# Altium PCB ADC_Mod_1.PcbDoc
Units mil, origin at the board's own origin, x right, y up, seen from the top; angles counter-clockwise.
Board outline 625.03 x 895.03 mil, 4 copper layers (Top Layer, Signal Layer 1, Signal Layer 2, Bottom Layer), stack 62.2 mil thick; 50 components, 47 nets, 208 pads, 31 vias.
Unrouted connection lines stored in the file: 3.
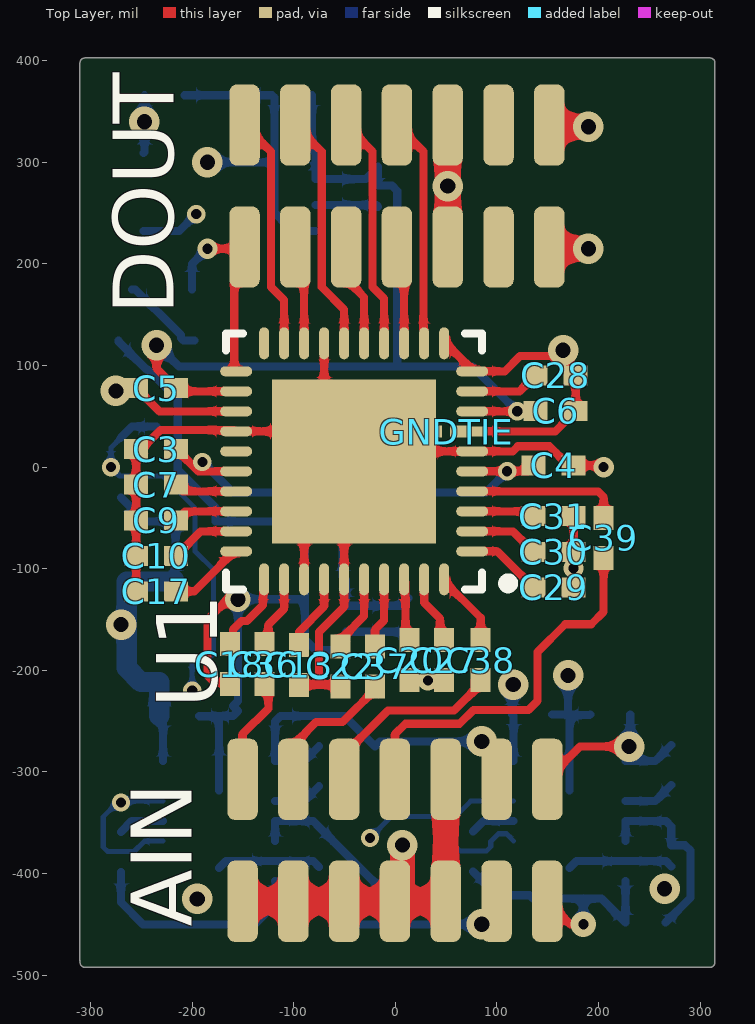
[diagram p0: Top Layer view]
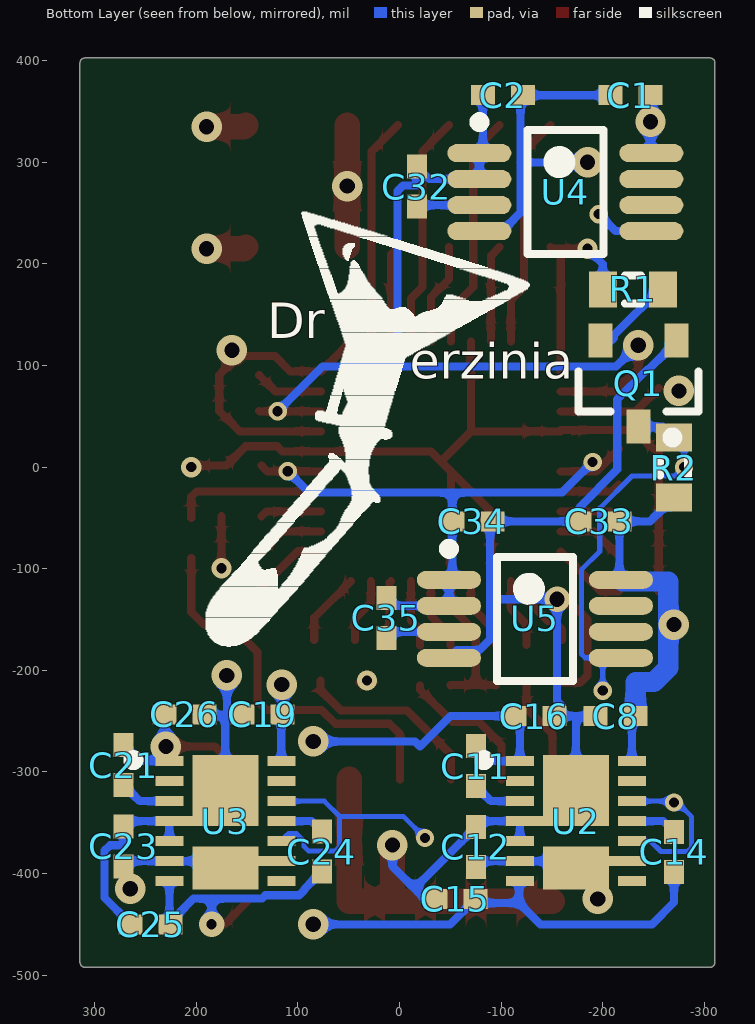
[diagram p1: Bottom Layer view, seen from below]
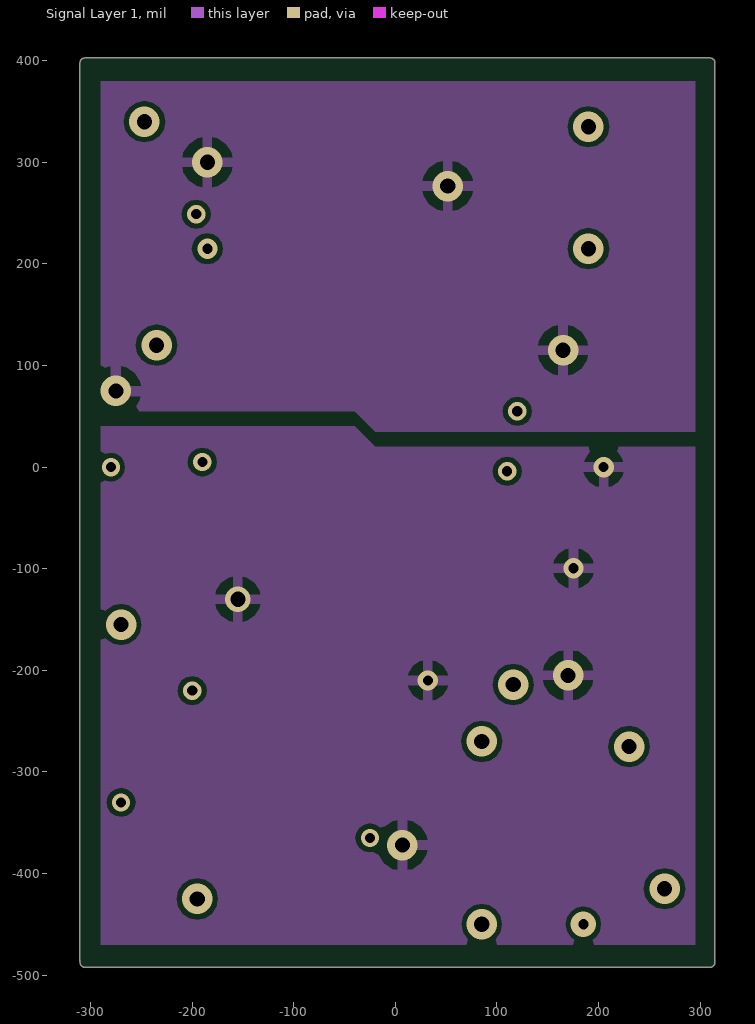
[diagram p2: Signal Layer 1]
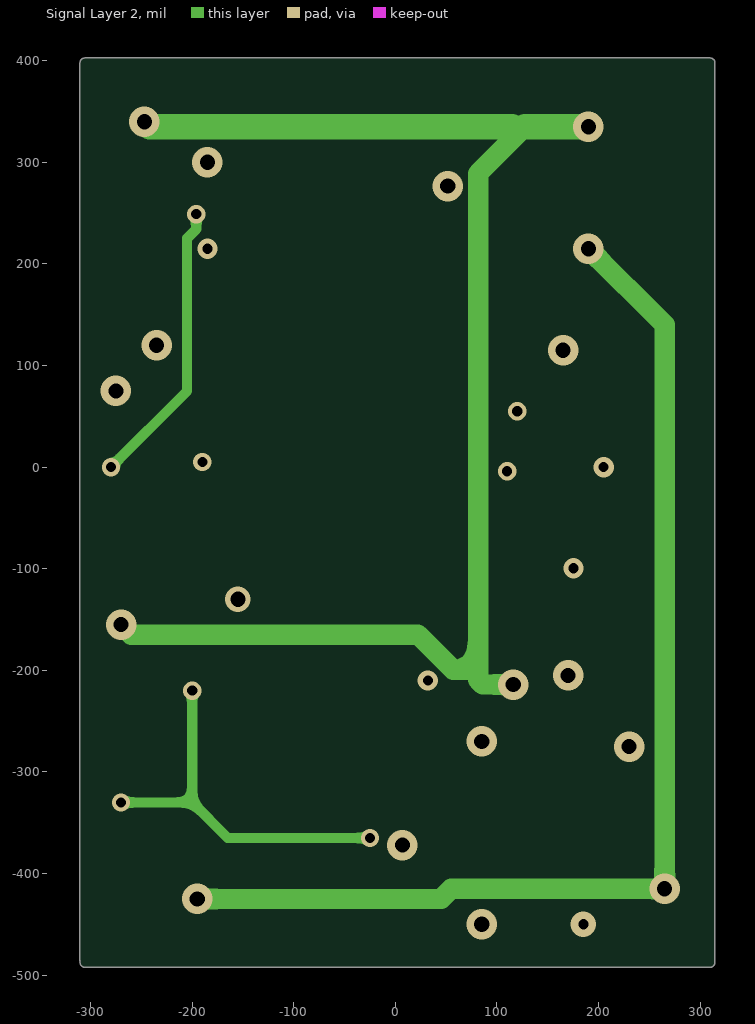
[diagram p3: Signal Layer 2]

## Layer stack, top to bottom
Top Solder: solder mask 0.4, Solder Resist, Dk 3.5
Top Layer: signal copper 1.4
Dielectric 1: core 7, FR-4, Dk 4.2
Signal Layer 1: signal copper 0.7
Dielectric 3: prepreg 44, Dk 4.2
Signal Layer 2: signal copper 0.7
Dielectric 2: core 7, Dk 4.2
Bottom Layer: signal copper 1.4
Bottom Solder: solder mask 0.4, Solder Resist, Dk 3.5

## Board outline
-310.34,-486.25 cw(c-305.43,-485.2) -310.45,-485.2 -310.45,397.71 cw(c-305.43,397.71) -305.43,402.72 309.57,402.72 cw(c309.57,397.71) 314.58,397.71 314.58,-487.29 cw(c309.57,-487.29) 309.57,-492.31 -305.43,-492.31 cw(c-305.43,-487.29)

## Design rules (kind name [scope] priority, off if disabled: settings)
Clearance [All] p1: gap=5 ignorepadtopadclearanceinfootprint=FALSE except(0: Arc-Hole Track-Hole SMDPad-Hole THPad-Hole Via-Hole Fill-Hole Poly-Hole Region-Hole Text-Hole)
HoleSize [All] p1: absolutevalues=TRUE maxlimit=100 minlimit=10 maxpercent=80.000 minpercent=20.000
PolygonConnect [All] p1: connectstyle=Relief reliefconductorwidth=10 reliefentries=4 polygonreliefangle="90 Angle" airgapwidth=10
RoutingVias [All] p1: holewidth=10 width=20 viastyle="Through Hole" minholewidth=10 minwidth=18 maxholewidth=28 maxwidth=50
SolderMaskExpansion [All] p1: expansion=4
Width [All] p1: maxlimit=25 minlimit=5 preferedwidth=10 toplayer_prefwidth=8 midlayer1_minwidth=10 midlayer2_minwidth=10 bottomlayer_prefwidth=8 minimp=50.000000 maximp=50.000000 favimp=50.000000
29 further rules are at their usual default settings.

## Components (designator, comment, footprint, x,y, rotation, side; value= is the part's Value field where it differs from the comment)
AIN "Header 7X2" CLP-107-02-L-DH-TR -0.43,-367.29 r180 top
C1 "Cap" 0402 -227.28,366.02 r180 bottom value=1uF
C2 "Cap" 0402 -101.65,366.02 r0 bottom value=10uF
C3 "Cap" 0402 -235.43,17.71 r0 top value=1uF
C4 "Cap" 0402 155.67,1.65 r180 top value=1uF
C5 "Cap" 0402 -235.43,77.71 r180 top value=1uF
C6 "Cap" 0402 157.8,55.39 r0 top value=1uF
C7 "Cap" 0402 -235.43,-17.29 r0 top value=1uF
C8 "Cap" 0402 -212.72,-245.04 r0 bottom value=10uF
C9 "Cap" 0402 -235.43,-52.29 r0 top value=1uF
C10 "Cap" 0402 -235.43,-87.29 r0 top value=1uF
C11 "Cap" 0402 -75.16,-294.41 r90 bottom value=0.01uF
C12 "Cap" 0402 -75.16,-373.78 r90 bottom value=10uF
C13 "Cap" 0402 -95,-194.69 r90 top value=1uF
C14 "Cap" 0402 -270.16,-378.78 r270 bottom value=0.01uF
C15 "Cap" 0402 -55,-425 r180 bottom value=10uF
C16 "Cap" 0402 -132.72,-245.04 r0 bottom value=10uF
C17 "Cap" 0402 -235.43,-122.29 r0 top value=1uF
C18 "Cap" 0402 -163,-194 r90 top value=10uF
C19 "Cap" 0402 134.72,-243.46 r0 bottom value=10uF
C20 "Cap" 0402 14,-190 r90 top value=1uF
C21 "Cap" 0402 271.54,-293.35 r90 bottom value=0.01uF
C22 "Cap" 0402 -54,-196 r90 top value=10uF
C23 "Cap" 0402 271.54,-373.35 r90 bottom value=10uF
C24 "Cap" 0402 76.54,-378.35 r270 bottom value=0.01uF
C25 "Cap" 0402 245,-450 r180 bottom value=10uF
C26 "Cap" 0402 211.54,-243.35 r0 bottom value=10uF
C27 "Cap" 0402 48,-190 r90 top value=1uF
C28 "Cap" 0402 157.8,90.39 r0 top value=10uF
C29 "Cap" 0402 155.67,-118.35 r180 top value=10uF
C30 "Cap" 0402 155.67,-83.35 r180 top value=1uF
C31 "Cap" 0402 155.67,-48.35 r180 top value=10uF
C32 "Cap" 0402 -16.97,276.02 r270 bottom value=10uF
C33 "Cap" 0402 -196.65,-53.35 r180 bottom value=1uF
C34 "Cap" 0402 -71.65,-53.35 r0 bottom value=10uF
C35 "Cap" 0402 13.03,-148.35 r270 bottom value=10uF
C36 "Cap" 0402 -129,-194 r90 top value=10uF
C37 "Cap" 0402 -20,-196 r90 top value=10uF
C38 "Cap" 0402 84,-190 r90 top value=10uF
C39 "Cap" 0402 205,-69.69 r90 top value=10uF
DOUT "Header 7X2" FTSH-107-01-L-DH 1.54,276.65 r180 top
GNDTIE "2 way net tie junction" 2way_LP 50,35 r180 top net-tie
Q1 "NPN" SOT23_L -235,82.32 r270 bottom
R1 "Res3" J1-0603 -229.53,175 r180 bottom value=1K
R2 "Res3" J1-0603 -270,-0.47 r270 bottom value=10K
U1 "MAXIM11043" QFN50P600X600X80_HS-41N -40.59,5.71 r180 top
U2 "LT3032EDE#PBF" LT-DE14MA-14_V -173.46,-348.46 r180 bottom
U3 "LT3032EDE#PBF" LT-DE14MA-14_V 171.54,-348.46 r180 bottom
U4 "LT1762EMS8-3.3#PBF" LT-MS8_N -163.23,270.71 r180 bottom
U5 "LT1762EMS8-3.3#PBF" LT-MS8_N -133.23,-149.29 r180 bottom

## Footprints (in the part's own frame and the unit in brackets; to place one, negate y for a bottom-side part, rotate by r counter-clockwise, add the part's x,y. Pads: shape width x height; smd on the part's side, far side on the other; paste and mask are expansions set on the pad)
2way_LP [mil] "2 way low power net tie junction"
  rrect5% 20x12 smd paste-100: 1(-14,0) 2(14,0)
0402 [mm] "Chip Capacitor, Body 1.0x0.5mm, IPC High Density"
  rect 0.6x0.5 smd: 1(-0.5,0) 2(0.5,0)
  body extent -0.55,-0.3 0.55,0.3, height 1.3
CLP-107-02-L-DH-TR [mil]
  rrect50% 30x80 smd: 1(150,60) 2(150,-60) 3(100,60) 4(100,-60) 5(50,60) 6(50,-60) 7(0,60) 8(0,-60) 9(-50,60) 10(-50,-60) 11(-100,60) 12(-100,-60) 13(-150,60) 14(-150,-60)
  body extent -184,-90 184,90, height 136
FTSH-107-01-L-DH [mil]
  rrect50% 30x80 smd: 1(150,60) 2(150,-60) 3(100,60) 4(100,-60) 5(50,60) 6(50,-60) 7(0,60) 8(0,-60) 9(-50,60) 10(-50,-60) 11(-100,60) 12(-100,-60) 13(-150,60) 14(-150,-60)
  body extent -175,-344 175,85, height 132
J1-0603 [mm] "Chip Resistor, Body 1.6x0.8mm, IPC High Density"
  rect 0.7x0.9 smd: 1(-0.75,0) 2(0.75,0)
  silkscreen extent -0.2,-0.35 0.2,0.35, body extent -0.85,-0.48 0.85,0.48, height 0.9
LT-DE14MA-14_V [mm] "DE14MA, 14-Leads, Body 4x3mm, Pitch 0.5mm"
  rect 0.7x0.25 smd: 1(-1.4,1.5) 2(-1.4,1) 3(-1.4,0.5) 4(-1.4,0) 5(-1.4,-0.5) 6(-1.4,-1) 7(-1.4,-1.5) 8(1.4,-1.5) 9(1.4,-1) 10(1.4,-0.5) 11(1.4,0) 12(1.4,0.5) 13(1.4,1) 14(1.4,1.5)
  rect 1.65x1.78 smd: 15(0,0.765)
  rect 1.65x1.07 smd: 16(0,-1.17)
  rect 0.3x0.25 smd: ""(-0.97,0)
  rect 0.5x0.25 smd: ""(0.9,-1)
  silkscreen extent -2.43,1.4 -2.18,1.65, body extent -1.5,-2 1.5,2, height 0.75
LT-MS8_N [mm] "SOP, 8-Leads, Body 3x3mm, Pitch 0.65mm, IPC Medium Density"
  oval 1.6x0.45 smd: 1(-2.15,0.975) 2(-2.15,0.325) 3(-2.15,-0.325) 4(-2.15,-0.975) 5(2.15,-0.975) 6(2.15,-0.325) 7(2.15,0.325) 8(2.15,0.975)
  silkscreen extent -2.28,-1.55 0.95,1.87, body extent -1.55,-1.55 1.55,1.55, height 1.1
QFN50P600X600X80_HS-41N [mm] "QFN, 40-Leads, Body 6.00x6.00mm, Pitch 0.50mm, Thermal Pad 4.10x4.10mm, IPC Medium Density"
  oval 0.8x0.25 smd: 1(-2.95,2.25) 2(-2.95,1.75) 3(-2.95,1.25) 4(-2.95,0.75) 5(-2.95,0.25) 6(-2.95,-0.25) 7(-2.95,-0.75) 8(-2.95,-1.25) 9(-2.95,-1.75) 10(-2.95,-2.25) 21(2.95,-2.25) 22(2.95,-1.75) 23(2.95,-1.25) 24(2.95,-0.75) 25(2.95,-0.25) 26(2.95,0.25) 27(2.95,0.75) 28(2.95,1.25) 29(2.95,1.75) 30(2.95,2.25)
  oval 0.25x0.8 smd: 11(-2.25,-2.95) 12(-1.75,-2.95) 13(-1.25,-2.95) 14(-0.75,-2.95) 15(-0.25,-2.95) 16(0.25,-2.95) 17(0.75,-2.95) 18(1.25,-2.95) 19(1.75,-2.95) 20(2.25,-2.95) 31(2.25,2.95) 32(1.75,2.95) 33(1.25,2.95) 34(0.75,2.95) 35(0.25,2.95) 36(-0.25,2.95) 37(-0.75,2.95) 38(-1.25,2.95) 39(-1.75,2.95) 40(-2.25,2.95)
  rect 4.1x4.1 smd: 41(0,0)
  silkscreen extent -3.98,-3.2 3.2,3.2, body extent -3.05,-3.05 3.05,3.05, height 0.8
SOT23_L [mm] "SOT23, 3-Leads, Body 2.9x1.3mm, Pitch 0.95mm, Lead Span 2.3mm - Reverse Pinning, IPC High Density"
  rect 0.85x0.6 smd: 1(1.075,0) 2(-1.075,-0.95) 3(-1.075,0.95)
  silkscreen extent -0.3,-1.5 1.47,1.5, body extent -0.7,-1.5 0.7,1.5, height 1.1

## Part data
AIN DOUT: "Header, 7-Pin, Dual row", LatestRevisionDate=17-Jul-2002, LatestRevisionNote="Re-released for DXP Platform.", Publisher="Altium Limited", System=Connector
C1 C2 C3 C4 C5 C6 C7 C8 C9 C10 C11 C12 C13 C14 C15 C16 C17 C18 C19 C20 C21 C22 C23 C24 C25 C26 C27 C28 C29 C30 C31 C32 C33 C34 C35 C36 C37 C38 C39: "Capacitor", LatestRevisionDate=17-Jul-2002, LatestRevisionNote="Re-released for DXP Platform.", PackageDescription="Radial Cap, Thru-Hole; 2 Leads; 0.3 in Pin Spacing", PackageReference=RAD-0.3, Published=8-Jun-2000, Publisher="Altium Limited"
GNDTIE: library part 2way, ComponentLink1Description=Source, ComponentLink1URL=http://www.edatools.cz/addons, FootprintNote="LP=12mil, MP=40mil, HP=120mil"
Q1: "NPN Bipolar Transistor", Code_JEDEC=TO-226-AA, LatestRevisionDate=17-Jul-2002, LatestRevisionNote="Re-released for DXP Platform.", PackageDescription="TO, Flat Index; 3 In-Line, Axial Leads; Body Dia. 4.8mm; Leads 0.55 x 0.51 mm (max)", PackageReference=TO-226-AA, Published=8-Jun-2000, Publisher="Altium Limited"
R1 R2: "Resistor", LatestRevisionDate=29-May-2009, LatestRevisionNote="IPC-7351 Footprint Added.", PackageDescription="Chip Resistor", PackageReference=J1-0603, Published=8-Jun-2000, Publisher="Altium Limited"
U2 U3: "Dual 150 mA Positive / Negative Low Noise Low Dropout Linear Regulator, +/-2.3 to +/-20 V Vin, Adjustable Vout, 14-pin SON (DE14MA-14), -40 to 125 degC, Pb-Free", Dropout Voltage(V)=0.3, Manufacturer="Linear Technology", Output Voltage=Adj,-Adj, Shutdown Current(uA)=0.1, Supplier Part Number 1=LT3032EDE#PBF-ND, ComponentLink1Description="Manufacturer URL", ComponentLink1URL=http://www.linear.com/, ComponentLink2Description=Datasheet, ComponentLink2URL=http://cds.linear.com/docs/en/datasheet/3032fd.pdf, ComponentLink3Description="Package Specification", ComponentLink3URL=http://cds.linear.com/docs/en/packaging/DFN_14_05-08-1731.pdf, DatasheetVersion="Rev. D", Discrete Pass Element=no, Iout(mA)=150, Isupply(mA)=0.025, Mounting Technology="Surface Mount", Noise(uV)=30, Number of Outputs=2, PackageDescription="14-Pin Plastic DFN, Body 4 x 3 mm, Pitch 0.5 mm", PackageReference=DE14MA-14, PackageVersion="Rev. A, 06/2010", PartNumber=LT3032EDE#PBF, PSRR(dB)=68, RoHS=TRUE, Supplier 1=Digi-Key, Supplier 2=Farnell, Supplier 3=Newark, Supplier Part Number 2=2289423, Supplier Part Number 3=52R9875, Vin Max(V)=+/-20, Vin Min(V)=+/-2.3, Vout Max(V)=+/-20, Vout Min(V)=+/-1.22
U4 U5: "150 mA, Low Noise, LDO Micropower Regulator, 1.8 to 20 V Vin, 3.3 V Vout, 8-pin SOP (MS8-8), -40 to 125 degC, Pb-Free", Dropout Voltage(V)=0.27, Manufacturer="Linear Technology", Output Voltage="3.3 V", Shutdown Current(uA)=1, Supplier Part Number 1=LT1762EMS8-3.3#PBF-ND, ComponentLink1Description="Manufacturer URL", ComponentLink1URL=http://www.linear.com/, ComponentLink2Description=Datasheet, ComponentLink2URL=http://cds.linear.com/docs/en/datasheet/1762fa.pdf, ComponentLink3Description="Package Specification", ComponentLink3URL=http://cds.linear.com/docs/en/packaging/05081660_G_MS8.pdf, DatasheetVersion="Rev. A", Discrete Pass Element=no, Iout(mA)=150, Isupply(mA)=0.025, Mounting Technology="Surface Mount", Noise(uV)=20, Number of Outputs=1, PackageDescription="8-Pin Plastic MSOP, Body 3 x 3 mm, Pitch 0.65 mm", PackageReference=MS8, PackageVersion="Rev. G, 05/2013", PartNumber=LT1762EMS8-3.3#PBF, PSRR(dB)=65, RoHS=TRUE, Supplier 1=Digi-Key, Supplier 2=Farnell, Supplier 3=Newark, Supplier Part Number 2=1273611, Supplier Part Number 3=57M6001, Vin Max(V)=20, Vin Min(V)=1.8

## Via types
v1: diameter 30, hole 15, Top Layer to Bottom Layer, 17 vias
v2: diameter 18, hole 10, Top Layer to Bottom Layer, 8 vias
v3: diameter 20, hole 10, Top Layer to Bottom Layer, 4 vias
v4: diameter 25, hole 15, Top Layer to Bottom Layer, 1 vias
v5: diameter 25, hole 10, Top Layer to Bottom Layer, 1 vias

## Nets (pads, with @x,y where several pads share a name; then routed paths per layer and width w, separated by ;. In a path a pad name is that pad's centre, name@x,y a point inside that pad or via, vN(x,y) a via of type N, cw(c..) or ccw(c..) an arc to the next point about the centre after c; other vN are vias at no path point)
3.3VA: AIN.12 C11.2 C16.2 U2.1 | length 308.4
  Bottom Layer w8: C11.2 -89.84,-289.41 U2.1 -118.35,-250.35 C16.2 -49.96,-245.04 -20,-275 -15,-270 v1(85,-270)
3.3VA2: C3.2 C4.2 C34.2 C35.1 U1.5 U1.26 U5.1 U5.2 | length 626
  Top Layer w8: C3.2 -193.91,-4.13 U1.26@-158.59,-4.13 ; U1.5@77.41,-4.13 v2(110,-4.13) 130.2,-4.13 C4.2
  Bottom Layer w8: v2(-190,5) -160,-25 -51.97,-25 ; C35.1 5.2,-136.5 U5.2 U5.1 -51.97,-107.52 C34.2 -51.97,-25 ; v2(110,-4.13) 89.13,-25 -51.97,-25
3.3VD: C2.2 C5.1 C6.1 C32.1 U1.8 U1.22 U4.1 U4.2 | length 916
  Top Layer w8: v1(-235,120) -235,96.96 C5.1 -212.65,74.61 U1.22@-158.59,74.61 ; U1.8@77.41,54.92 v2(120,54.92) 137.64,54.92 C6.1
  Bottom Layer w8: v1(-235,120) -234.22,120 -213.14,98.91 5,98.91 ; C2.2 -81.97,312.48 U4.1 U4.2 -29.17,283.5 C32.1 -16.97,277.15 -3.4,277.15 1.87,271.88 1.87,102.04 5,98.91 ; v2(120,54.92) 76.01,98.91 5,98.91
5VA: AIN.14 C21.2 C26.2 U3.1 | length 193.2
  Top Layer w8: AIN.14 181.86,-275 v1(230,-275)
  Bottom Layer w8: C26.2 231.22,-284.84 U3.1 255.79,-289.41 C21.2
-3.3VA: AIN.11 C14.2 C15.2 U2.7 | length 436.5
  Bottom Layer w8: C14.2 -270.16,-428.23 -248.35,-450.04 -138.66,-450.04 -117.72,-429.09 ; U2.7 -117.72,-408.15 -117.72,-429.09 ; v1(85,-450) -49.68,-450 C15.2 -78.78,-429.09 -117.72,-429.09
-5VA: AIN.13 C24.2 C25.2 U3.7 | length 282.6
  Top Layer w8: AIN.13 172.28,-450 v5(185,-450)
  Bottom Layer w8: C24.2 93.64,-415.13 93.64,-416.17 98.91,-421.44 132.18,-421.44 135.33,-424.59 185,-424.59 ; v5(185,-450) 185,-424.59 ; U3.7 226.54,-407.64 226.54,-448.35 202.78,-424.59 185,-424.59
-V: C12.1 C23.1 DOUT.13 U2.6 U2.9 U2.16 U3.6 U3.9 U3.16 | length 1372.7
  Top Layer w25: DOUT.13 153.19,215 v1(190,215)
  Signal Layer 2 w20: v1(-195,-425) 45,-425 55,-415 v1(265,-415) 265,140 v1(190,215)
  Bottom Layer w8: U2.16 -166.77,-387.83 U2.6 -80.79,-387.83 C12.1 ; U3.16 178.23,-387.83 U3.6 266.34,-387.83 C23.1
AGND: AIN.1 AIN.3 AIN.5 AIN.7 AIN.9 AIN.10 C3.1 C4.1 C7.1 C8.2 C9.1 C10.1 C12.2 C13.1 C15.1 C16.1 C17.1 C18.1 C19.2 C20.1 C22.1 C23.2 C25.1 C26.1 C27.1 C29.1 C30.1 C31.1 C33.1 C34.1 GNDTIE.2 Q1.3 U1.6 U1.17 U1.24 U1.33 U1.35 U1.41 U2.4 U2.5 U2.15 U3.4 U3.5 U3.15 U5.4 | length 3031.7
  Top Layer w8: C17.1 C10.1 C9.1 C7.1 C3.1 -250.13,17.71 -231.29,36.55 -158.59,36.55 -158.59,35.24 U1.41@-70.12,35.24 ; C18.1@-160,-211.98 -178.02,-211.98 -185,-205 -185,-150 -165,-130 v4(-155,-130) ; C13.1@-94.69,-214.68 C13.1 -75,-214.37 ; U1.33@-89.8,-112.29 -89.8,-43.5 U1.41@-50.43,-4.13 ; U1.17@-70.12,123.71 U1.41@-70.12,35.24 ; C22.1@-50,-214.68 -50.32,-214.37 -75,-214.37 ; v3(32,-210) 27.45,-210 25.47,-211.98 C27.1@39.57,-211.98 ; v3(175.35,-99.61) C30.1 C31.1 ; v3(205,0) 203.35,1.65 C4.1 170.37,1.65 151.52,20.5 120.45,20.5 115.5,15.55 77.41,15.55 -30.75,15.55 U1.41 ; -75,-214.37 -75,-162.4 -50.43,-137.83 -50.43,-112.29 U1.41@-50.43,-4.13 ; U1.41@-70.12,35.24 U1.41 ; U1.41@-50.43,-4.13 U1.41
  Top Layer w25: AIN.1 AIN.3 AIN.5 AIN.7 ; v1(7,-372) 7,-419.86 AIN.7 ; AIN.10 AIN.9 AIN.7
  Bottom Layer w8: Q1.3 -272.4,123.46 -244.94,96 -243.76,96 -214.19,66.43 -214.19,-2.4 -176.97,-39.62 C33.1 C34.1 -89.08,-55.61 -89.08,-135 ; C8.2 -192.91,-245.16 -173.46,-245.16 ; U2.15 -173.46,-245.16 ; U2.5 U2.4 -80.79,-348.46 C12.2 -14.63,-414.63 ; U5.4 -56.32,-179.94 -78.62,-179.94 -89.08,-169.48 -89.08,-135 ; C15.1 -25,-425 -14.63,-414.63 ; v1(7,-372) 7,-393 -14.63,-414.63 ; C19.2 171.02,-243.46 ; v1(170,-205) 170,-242.44 171.02,-243.46 ; U3.15 171.54,-243.98 ; C26.1 191.22,-243.98 171.54,-243.98 ; U3.5 U3.4 266.34,-348.46 C23.2 271.54,-372.22 285.11,-372.22 290.38,-377.49 290.38,-423.87 C25.1@265.91,-448.35 ; -173.46,-245.16 -173.35,-245.04 -160,-245.04 -155,-240.04 -160,-235.04 -155,-230.04 v4(-155,-130) -94.08,-130 -89.08,-135 ; 171.02,-243.46 171.54,-243.98
DGND: C1.1 C2.1 C5.2 C6.2 C28.2 DOUT.9 DOUT.10 GNDTIE.1 U1.7 U1.10 U1.11 U1.23 U4.4 | length 841.7
  Top Layer w8: C5.2 -232.33,54.92 U1.23@-158.59,54.92 ; U1.11@47.99,123.71 77.41,94.29 107.63,94.29 122.57,109.24 153.65,109.24 158.92,103.96 163.91,103.96 C28.2 C6.2 157.32,35.24 U1.7@77.41,35.24
  Top Layer w25: DOUT.9 v1(51.54,276.65) DOUT.10
  Bottom Layer w8: C1.1 C2.1 -119.08,363.76 -119.08,300 ; v1(-185,300) -119.08,300 ; U4.4 -100.89,232.32 -119.08,250.52 -119.08,300
  other v1: -275,75 165,115
NetAIN_2: AIN.2 C36.1 | length 103.5
  Top Layer w8: AIN.2 -150.43,-262.83 -125,-237.4 C36.1@-125,-214.37
NetAIN_4: AIN.4 C37.1 | length 140.9
  Top Layer w8: AIN.4 -100.43,-273.43 -78,-251 -51.93,-251 -20,-219.07 C37.1@-20,-215
NetAIN_6: AIN.6 C38.1 | length 188.6
  Top Layer w8: AIN.6 -50.43,-282.83 -7.2,-239.61 57.8,-239.61 78,-219.4 C38.1@78,-210
NetAIN_8: AIN.8 C39.1 | length 381
  Top Layer w8: AIN.8 -0.43,-262.83 9.8,-252.61 63.18,-252.61 76.79,-239 131,-239 140,-230 140,-181.81 167.2,-154.61 192.8,-154.61 205,-142.4 C39.1
NetC7_2: C7.2 U1.27 | length 59.9
  Top Layer w8: C7.2 -209.22,-23.82 U1.27@-158.59,-23.82
NetC9_2: C9.2 U1.28 | length 60.8
  Top Layer w8: C9.2 -206.96,-43.5 U1.28@-158.59,-43.5
NetC10_2: C10.2 U1.29 | length 67.1
  Top Layer w8: C10.2 -191.65,-63.19 U1.29@-158.59,-63.19
NetC11_1: C11.1 U2.3 | length 49.3
  Bottom Layer w8: U2.3 -89.84,-328.78 C11.1
NetC13_2: C13.2 U1.34 | length 73
  Top Layer w8: C13.2 -95,-162.13 -70.12,-137.24 U1.34@-70.12,-112.29
NetC14_1: C14.1 U2.11 | length 46
  Bottom Layer w8: C14.1 -259.53,-348.46 U2.11
NetC17_2: C17.2 U1.30 | length 73.5
  Top Layer w8: C17.2 -198.01,-122.29 U1.30@-158.59,-82.87
NetC18_2: C18.2 U1.31 | length 74
  Top Layer w8: C18.2@-160,-170.31 -160,-160 -151.5,-151.5 -146.09,-151.5 -130.43,-135.84 -130.43,-113.55 U1.31@-129.17,-112.29
NetC20_2: C20.2 U1.38 | length 58.6
  Top Layer w8: U1.38@8.62,-112.29 10,-113.67 C20.2@10,-170.31
NetC21_1: C21.1 U3.3 | length 51.4
  Bottom Layer w8: U3.3 255.79,-328.78 C21.1
NetC22_2: C22.2 U1.36 | length 71
  Top Layer w8: C22.2@-50,-175.31 -50,-165.93 -30.75,-146.68 U1.36@-30.75,-112.29
NetC24_1: C24.1 U3.11 | length 44.1
  Bottom Layer w8: C24.1 86.73,-348.46 U3.11
NetC27_2: C27.2 U1.39 | length 64.5
  Top Layer w8: U1.39@28.31,-112.29 28.31,-133.31 44,-149 C27.2@44,-170.31
NetC28_1: C28.1 U1.9 | length 67.2
  Top Layer w8: U1.9@77.41,74.61 122.32,74.61 C28.1
NetC29_2: C29.2 U1.1 | length 73.3
  Top Layer w8: U1.1@77.41,-82.87 100.51,-82.87 C29.2
NetC30_2: C30.2 U1.2 | length 66.9
  Top Layer w8: U1.2@77.41,-63.19 115.83,-63.19 C30.2
NetC31_2: C31.2 U1.3 | length 60.6
  Top Layer w8: U1.3@77.41,-43.5 131.14,-43.5 C31.2
NetC32_2: C32.2 U4.3 | length 62.3
  Bottom Layer w8: U4.3 -18.54,257.91 C32.2
NetC35_2: C35.2 U5.3 | length 64.1
  Bottom Layer w8: U5.3 7.09,-162.09 C35.2
NetC36_2: C36.2 U1.32 | length 69.1
  Top Layer w8: C36.2@-125,-175 -125,-155 -109.49,-139.49 U1.32@-109.49,-112.29
NetC37_2: C37.2 U1.37 | length 67
  Top Layer w8: C37.2@-20,-175.63 -20,-160 -11.06,-151.06 U1.37@-11.06,-112.29
NetC38_2: C38.2 U1.40 | length 72.9
  Top Layer w8: U1.40@47.99,-112.29 84,-148.3 C38.2
NetC39_2: C39.2 U1.4 | length 150.6
  Top Layer w8: U1.4@77.41,-23.82 199.63,-23.82 205,-29.19 C39.2
NetDOUT_1: DOUT.1 R1.1 U1.21 | length 207.7
  Top Layer w8: v3(-185,215) DOUT.1@-150.12,215 ; U1.21@-158.59,94.29 -158.59,206.53 DOUT.1@-150.12,215 ; DOUT.1 DOUT.1@-150.12,215
  Bottom Layer w8: R1.1 -200,200 v3(-185,215)
NetDOUT_2: DOUT.2 U1.19 | length 229.1
  Top Layer w8: DOUT.2 -122.46,310.65 -122.46,177.32 -109.49,164.34 U1.19@-109.49,123.71
NetDOUT_3: DOUT.3 U1.18 | length 96.5
  Top Layer w8: DOUT.3 -89.8,207.99 U1.18@-89.8,123.71
NetDOUT_4: DOUT.4 U1.16 | length 232.8
  Top Layer w8: DOUT.4 -72.46,310.65 -72.46,177.32 -50.43,155.29 U1.16@-50.43,123.71
NetDOUT_5: DOUT.5 U1.15 | length 100.3
  Top Layer w8: DOUT.5 -48.46,184.93 -30.75,167.22 U1.15@-30.75,123.71
NetDOUT_6: DOUT.6 U1.14 | length 228.4
  Top Layer w8: DOUT.6 -22.46,310.65 -22.46,177.32 -11.06,165.92 U1.14@-11.06,123.71
NetDOUT_7: DOUT.7 U1.13 | length 95.9
  Top Layer w8: DOUT.7 8.62,209.57 U1.13@8.62,123.71
NetDOUT_8: DOUT.8 U1.12 | length 224
  Top Layer w8: DOUT.8 27.54,310.65 27.54,124.48 U1.12@28.31,123.71
NetQ1_1: Q1.1 R2.1 U2.10 U2.12 U3.10 U3.12 U4.5 U5.5 | length 1509.4
  Signal Layer 2 w10: v2(-280,0) -205,75 -205,225.28 -196,234.28 v2(-196,249) ; v2(-270,-330) -200,-330 ; v2(-200,-220) -200,-330 ; v2(-25,-365) -165,-365 -200,-330
  Bottom Layer w5: R2.1 -280,19.06 v2(-280,0) -271.28,-8.72 -228.7,-8.72 -197.03,-40.4 -197.03,-82.97 -178.88,-101.12 -178.88,-183.88 -182.68,-187.68 -200.28,-187.68 -200,-187.95 v2(-200,-220) ; U2.10 -246.95,-368.15 -257.21,-378.41 -283.11,-378.41 -287.5,-374.01 -287.5,-344.18 -272.1,-328.78 U2.12 ; v2(-25,-365) -3.74,-343.74 59.19,-343.74 ; U3.10 109.15,-360.89 101.44,-360.89 93.88,-368.45 93.88,-373.58 89.48,-377.97 63.59,-377.97 59.19,-373.58 59.19,-343.74 ; U3.12 74.16,-328.78 59.19,-343.74
  Bottom Layer w8: R2.1 -259.06,40 Q1.1 ; U4.5 -212.68,232.32 v2(-196,249)
NetQ1_2: Q1.2 R1.2 | length 84.1
  Bottom Layer w8: R1.2 -256.06,175 -211,129.94 -211,126.94 -208.7,124.65 Q1.2
V: C1.2 C8.1 C19.1 C33.2 DOUT.14 R2.2 U2.14 U3.14 U4.8 U5.8 | length 1940.2
  Top Layer w25: DOUT.14 153.19,335 v1(190,335)
  Signal Layer 2 w20: v1(-270,-155) -260,-165 22.36,-165 57,-199.64 81.54,-199.64 ; v1(116,-214) 86,-214 81.54,-209.54 81.54,-199.64 ; 127.46,335 81.54,289.08 81.54,-199.64
  Signal Layer 2 w25: v1(-246.97,340) -241.97,335 115,335 ; 127.46,335 v1(190,335)
  Bottom Layer w8: R2.2 -246.65,-53.35 C33.2 -216.34,-109.37 U5.8 ; U4.8 -246.97,310 v1(-246.97,340) C1.2 ; C8.1 -228.58,-248.86 U2.14 ; v1(116,-214) 115.04,-214.96 C19.1 116.42,-244.84 U3.14
  Bottom Layer w20: C8.1 -232.4,-211.54 -250.39,-211.54 -264.37,-197.56 -264.37,-112.64 -219.61,-112.64 U5.8
pads on no net: DOUT.11 DOUT.12 U1.20 U1.25 U2. U2.2 U2.8 U2.13 U3. U3.2 U3.8 U3.13 U4.6 U4.7 U5.6 U5.7

## Polygon pours and split planes (outlines as drawn)
DGND on Signal Layer 1 "DGND_L02_P004" (solid, remove dead copper, pour order 4): 295,35 -20,35 -40,55 -290,55 -290,380 295,380
AGND on Signal Layer 1 "AGND_L02_P000" (solid, remove dead copper, pour order 0): 295,-470 -290,-470 -290,40 -40,40 -20,20 295,20

## Silkscreen, mask and mechanical layers (free items; w line width, h text height)
Bottom Overlay:
  drawing of 735 lines, arcs and shapes, not listed
  text "Dr" at 130,115 h60
  text "erzinia" at -10,75 h60
Mechanical 1:
  lines w10: -305.43,-487.29 309.57,-487.29 309.57,397.71 -305.43,397.71 -305.43,-485.2